# Altium PCB TEMPO.PcbDoc
Units mm, origin at the board's own origin, x right, y up, seen from the top; angles counter-clockwise.
Board outline 76.61 x 68.94 mm, 4 copper layers (Top Layer, Layer 1 - GND, Layer 2 - POWER, Bottom Layer), stack 1.541 mm thick; 93 components, 50 nets, 280 pads, 61 vias.
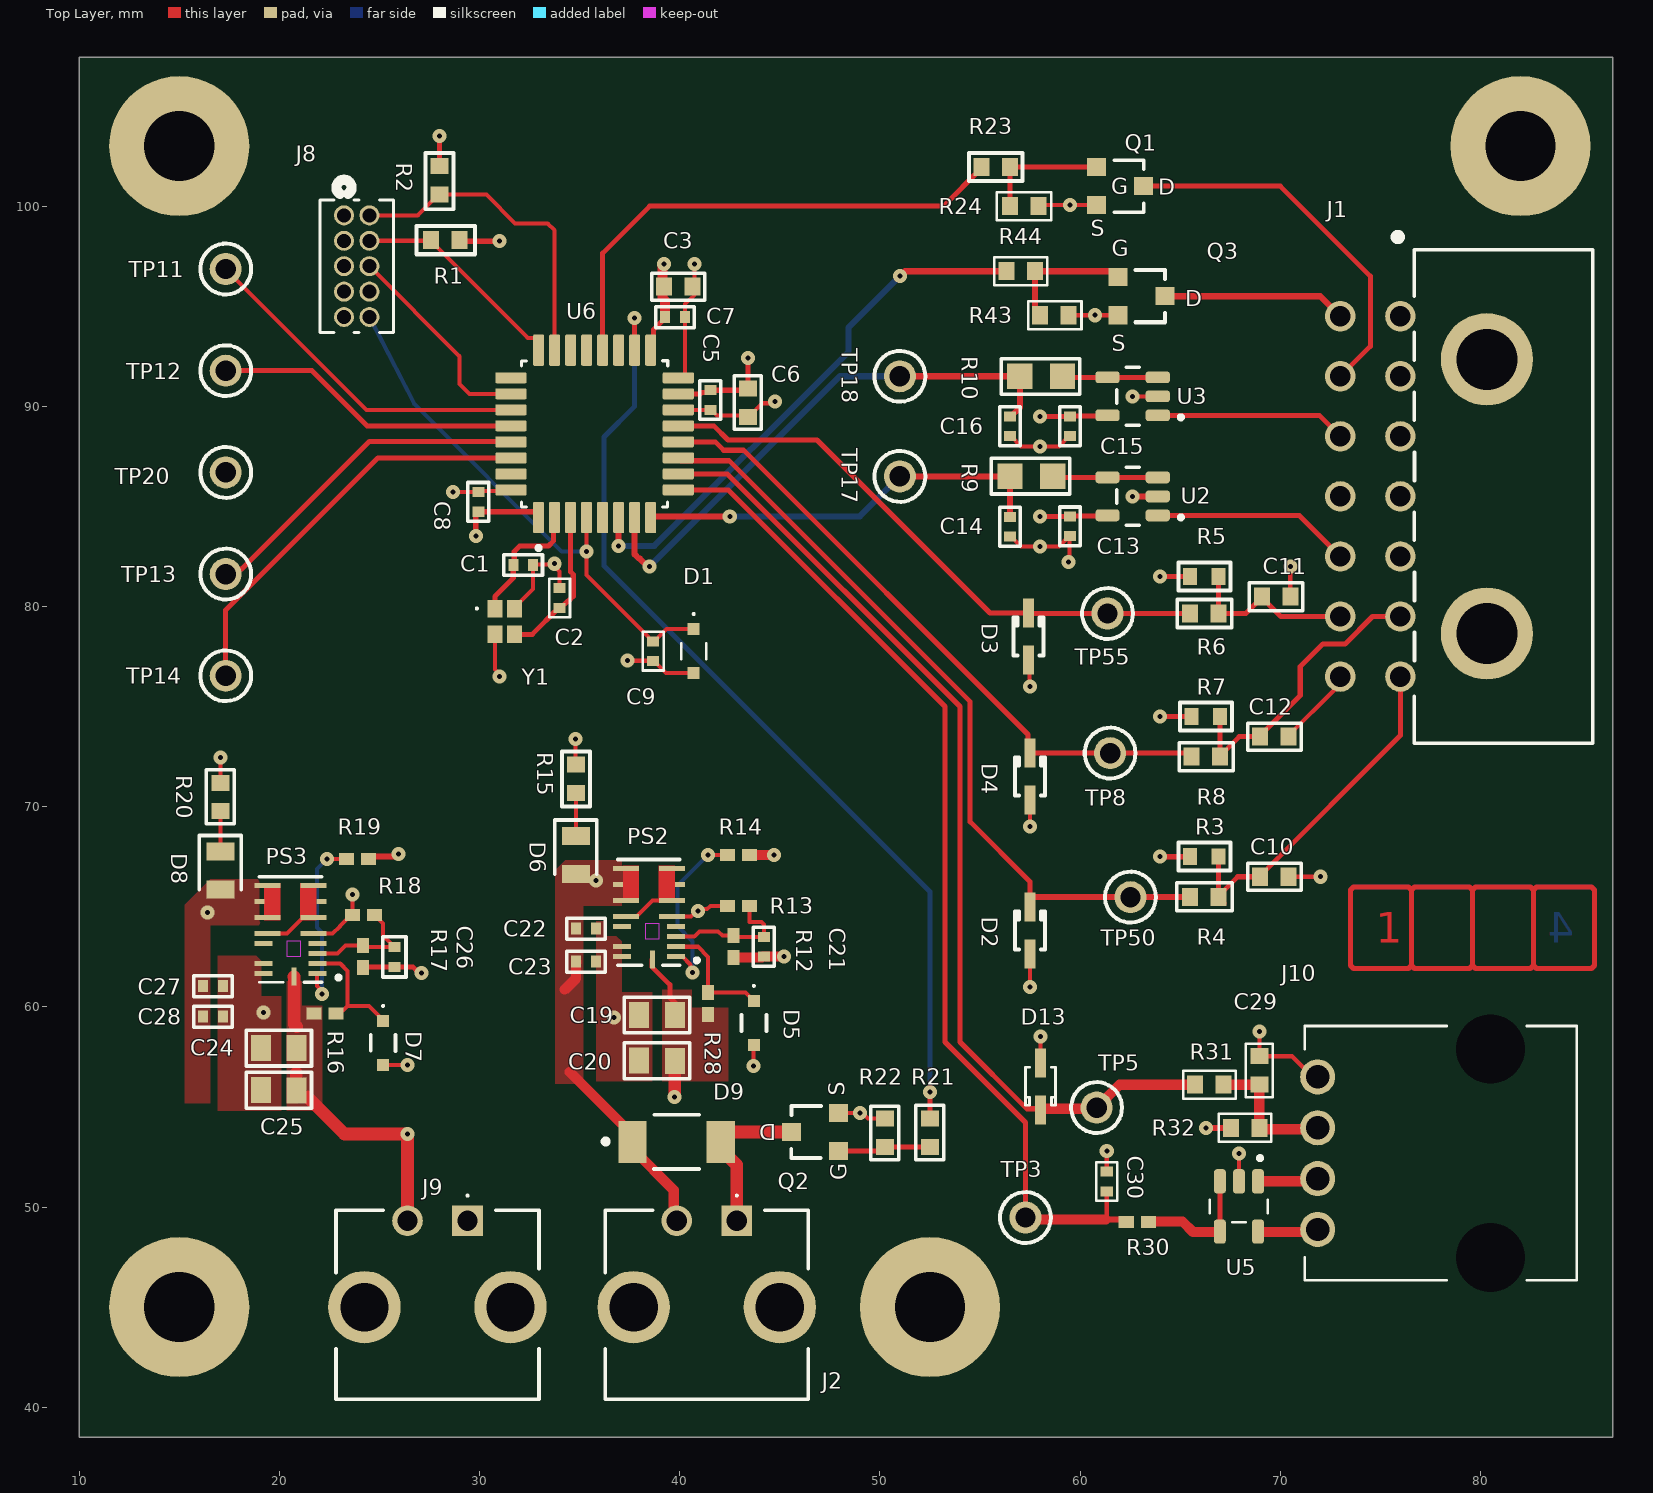
[diagram p0: Top Layer view]
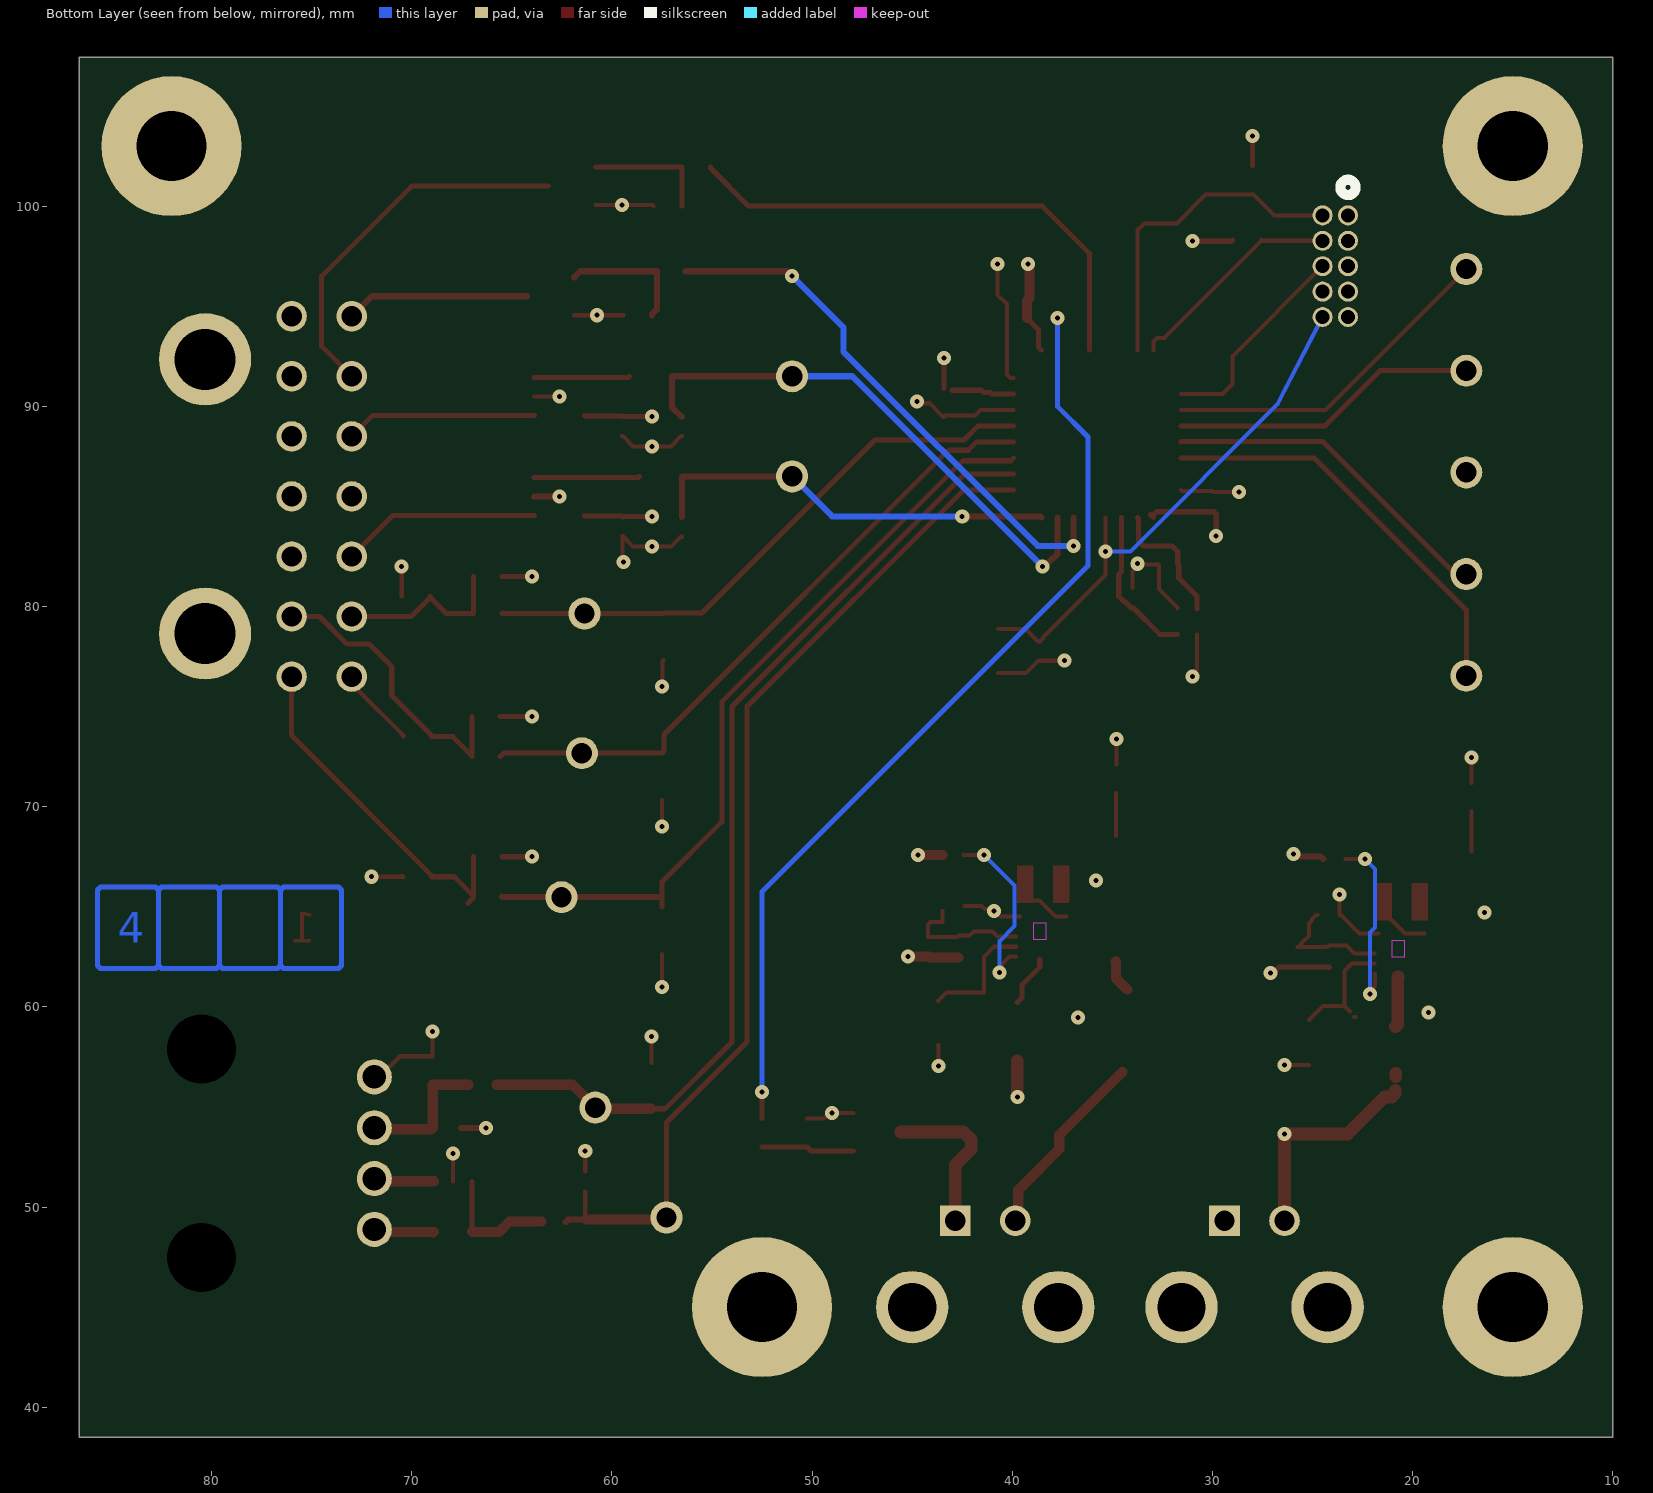
[diagram p1: Bottom Layer view, seen from below]
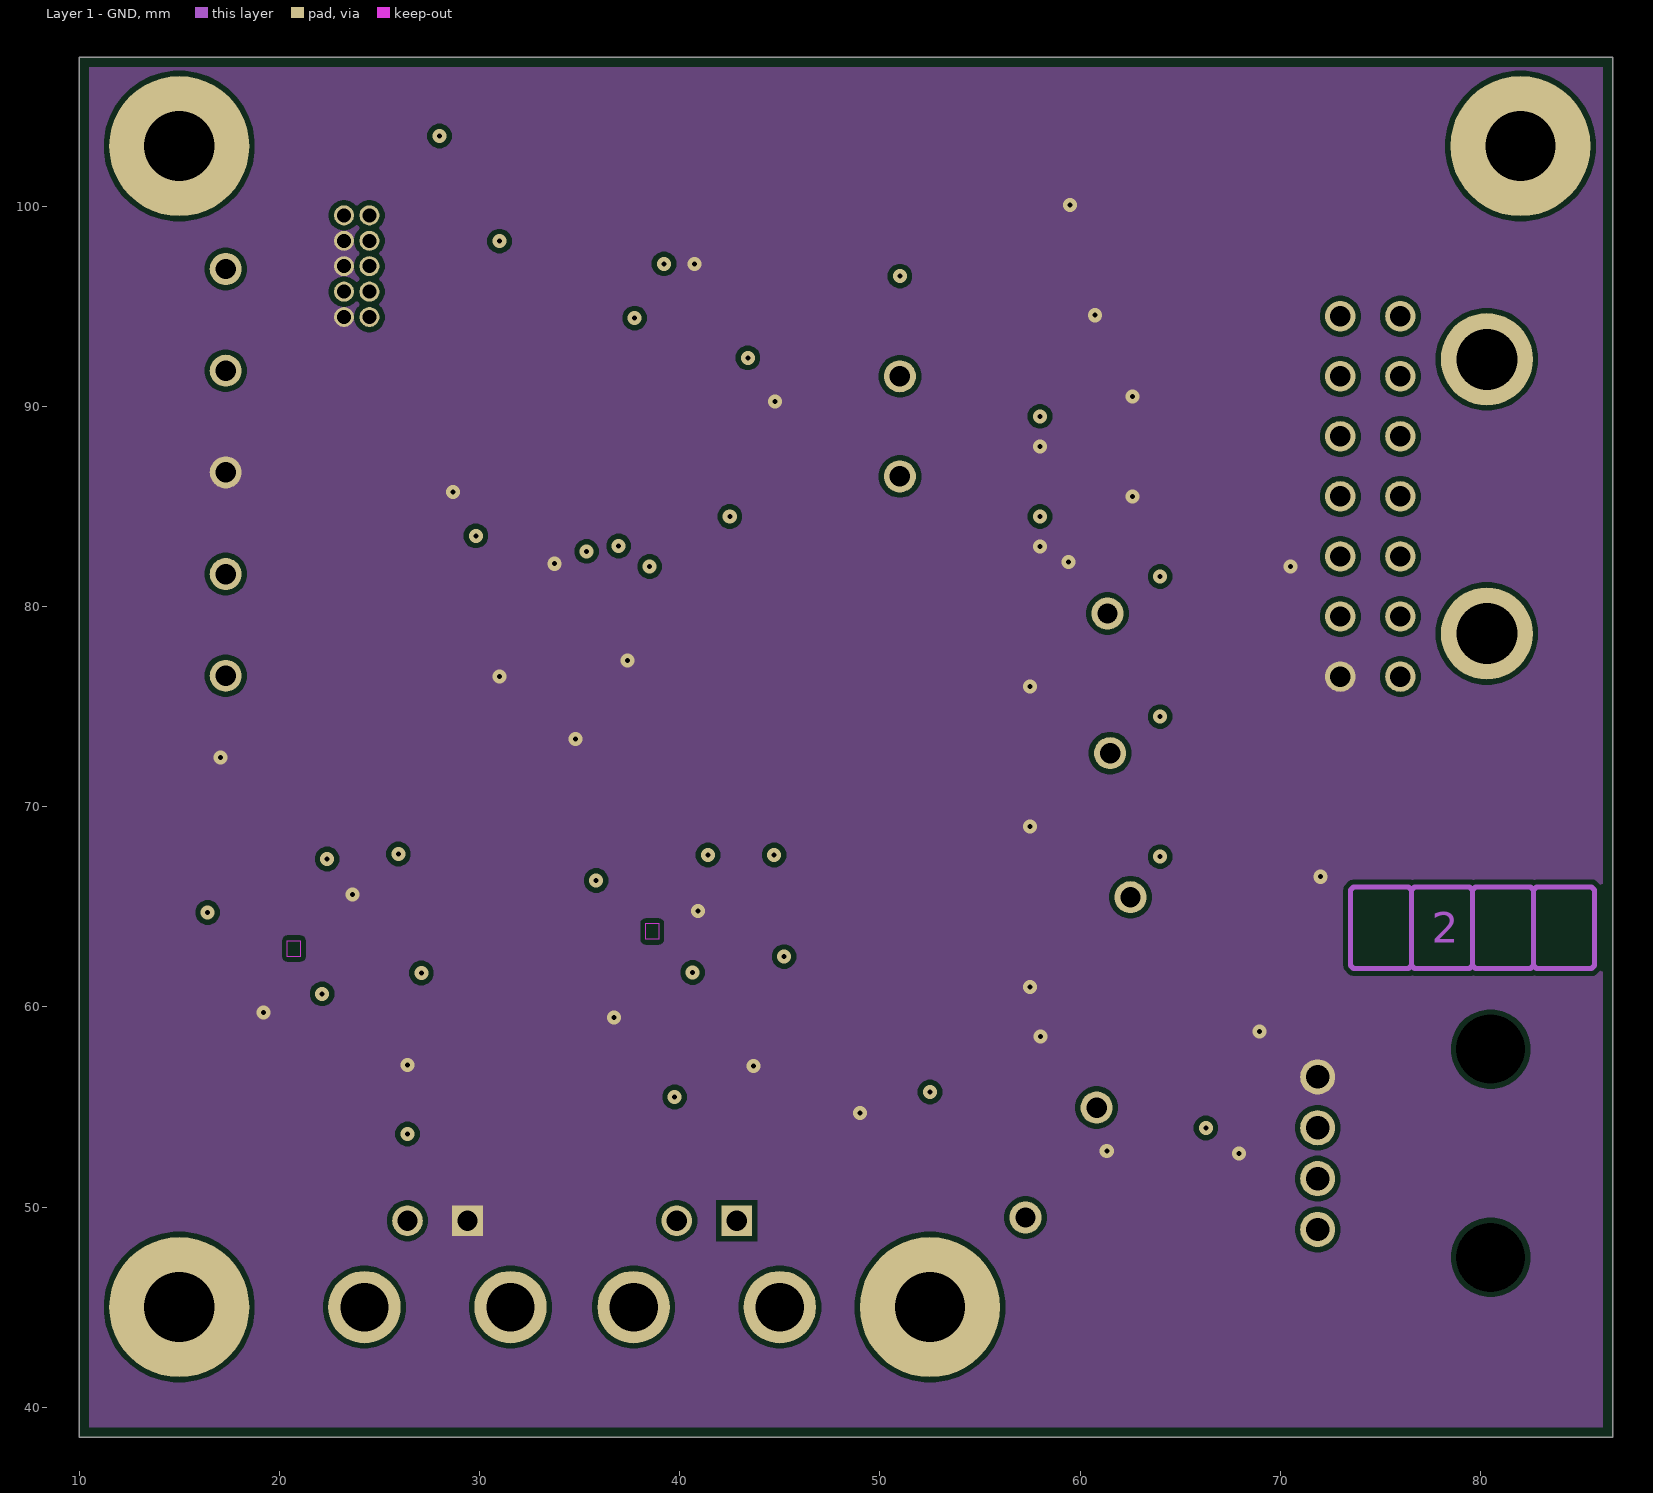
[diagram p2: Layer 1 - GND]
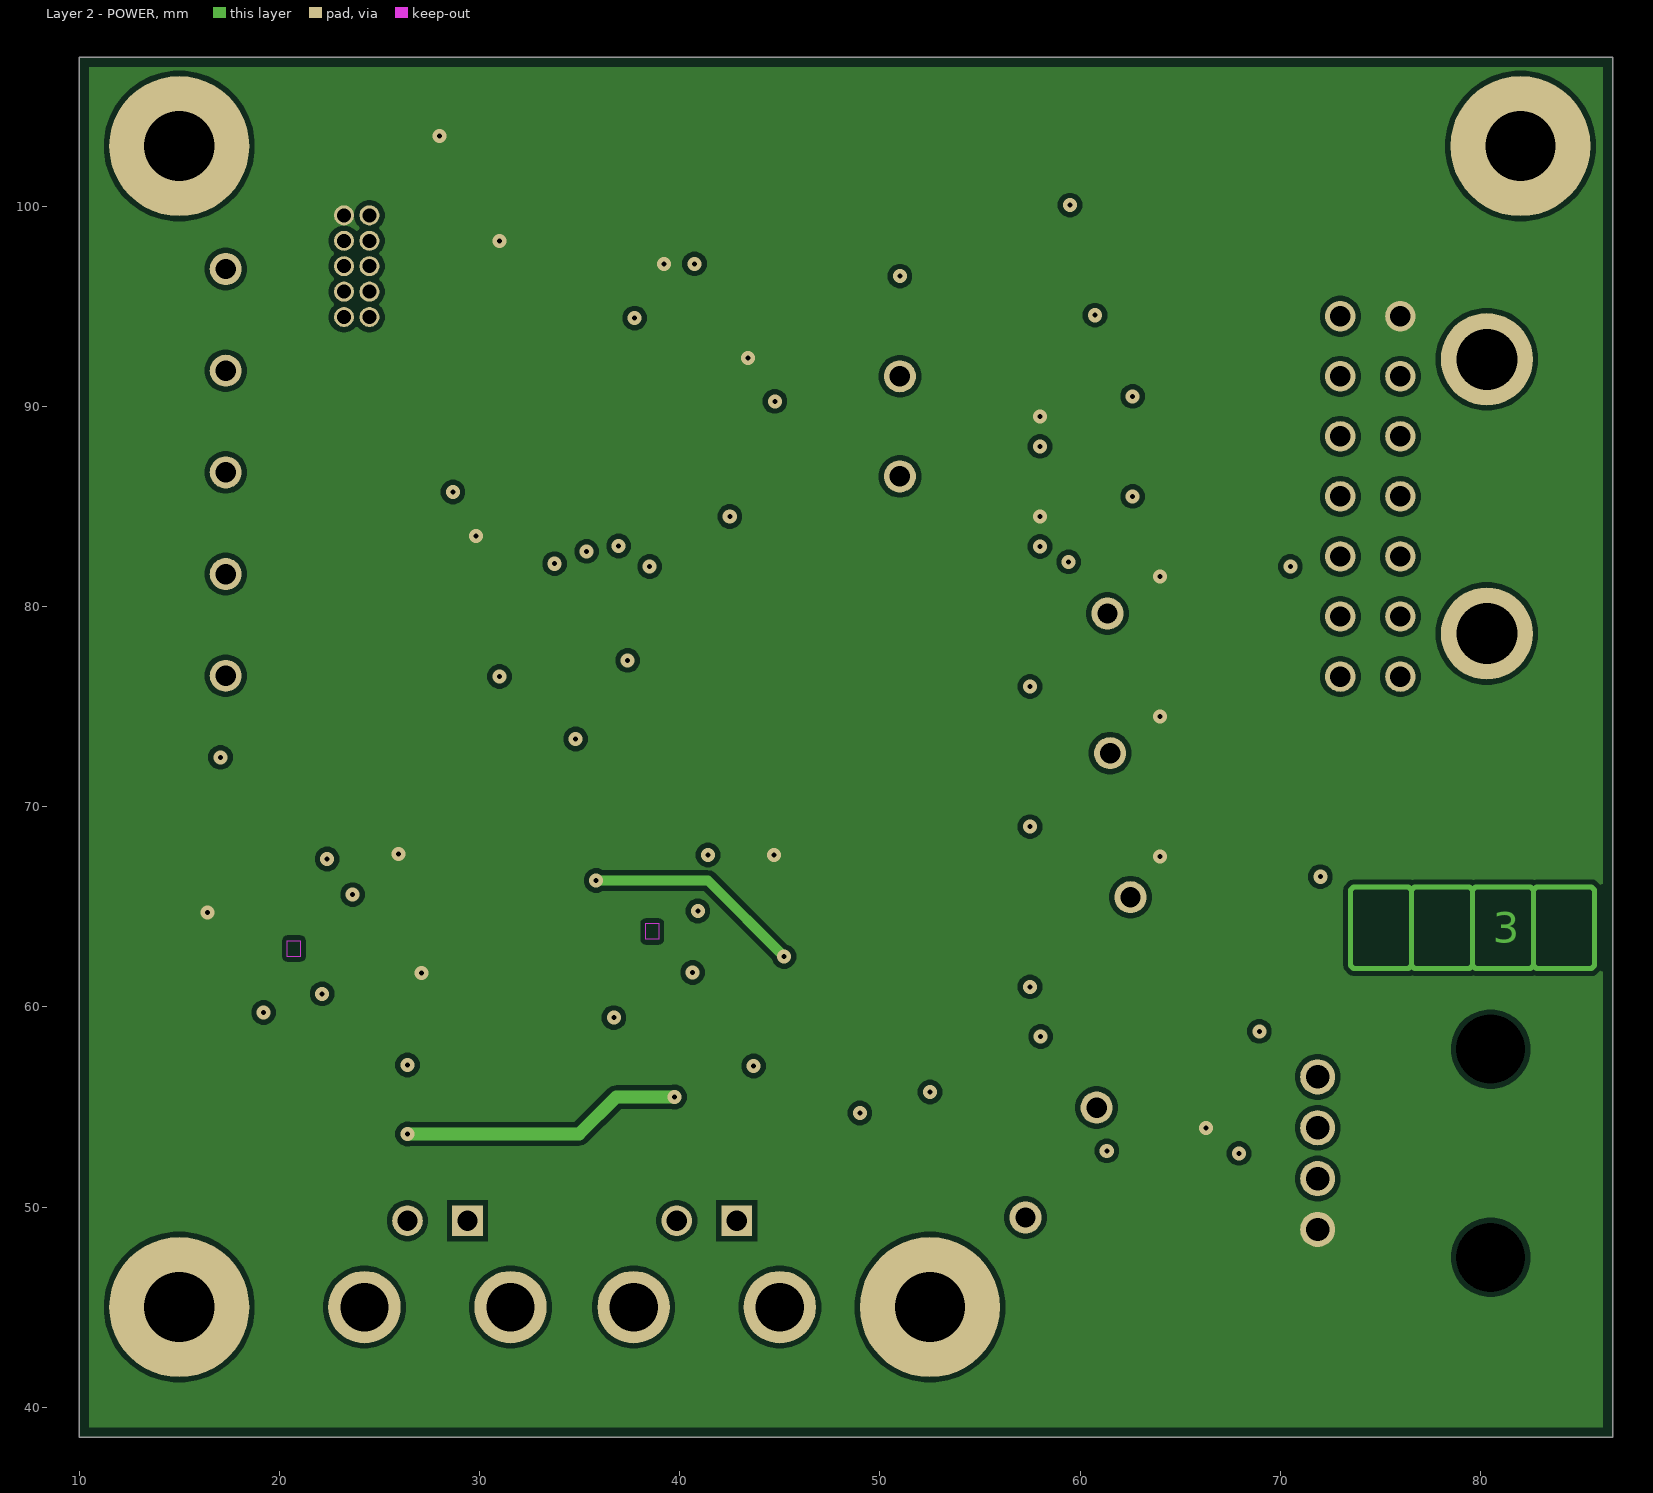
[diagram p3: Layer 2 - POWER]
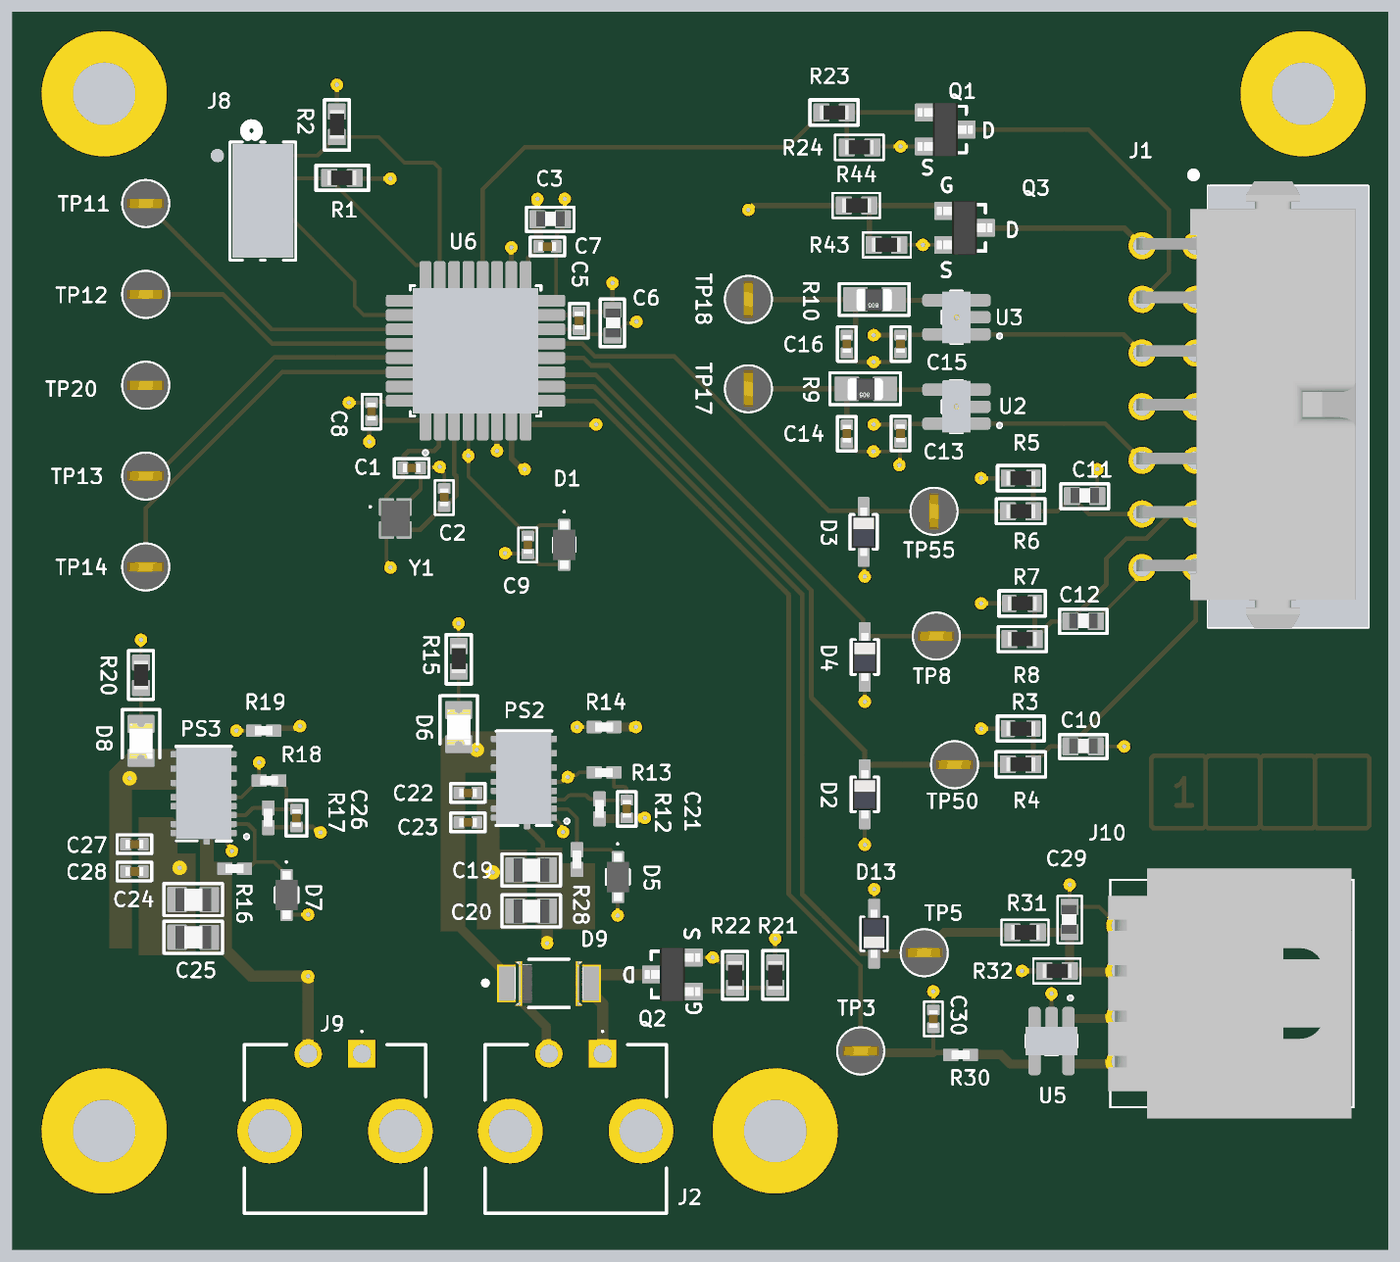
[diagram p4: 3D render of the assembled board from above, using the file's embedded part models]

## Layer stack, top to bottom
Top Solder: solder mask 0.0102, Solder Resist, Dk 3.5
Top Layer: signal copper 0.0356
Dielectric 2: prepreg 0.1, PP-006, Dk 4.1
Layer 1 - GND: signal copper 0.035
Dielectric 1: core 1.2, Core-043, Dk 4.3
Layer 2 - POWER: signal copper 0.035
Dielectric 3: prepreg 0.1, PP-006, Dk 4.1
Bottom Layer: signal copper 0.0356
Bottom Solder: solder mask 0.0102, Solder Resist, Dk 3.5

## Board outline
10,38.5 86.614,38.5 86.614,107.442 10,107.442

## Design rules (kind name [scope] priority, off if disabled: settings)
BoardOutlineClearance [All] p1: gap=0.5 ignorepadtopadclearanceinfootprint=FALSE
Clearance [All] p1: gap=0.254 ignorepadtopadclearanceinfootprint=TRUE except(0: Arc-Hole Track-Hole SMDPad-Hole THPad-Hole Via-Hole Fill-Hole Poly-Hole Region-Hole Text-Hole)
HoleSize [All] p1: absolutevalues=TRUE maxlimit=4 minlimit=0.25 maxpercent=80.000 minpercent=20.000
MinimumSolderMaskSliver [All] p1: minsoldermaskwidth=0.125
PasteMaskExpansion [All] p1: expansion=0.05
PolygonConnect [All] p1: connectstyle=Direct reliefconductorwidth=0.254 reliefentries=4 polygonreliefangle="90 Angle" airgapwidth=0.254
RoutingVias [All] p1: holewidth=0.711 width=1.27 viastyle="Through Hole" minholewidth=0.25 minwidth=0.7 maxholewidth=0.711 maxwidth=1.27
SilkToSilkClearance [All] p1: silktosilkclearance=0.125
SilkToSolderMaskClearance [IsPad] p1: minsilkscreentomaskgap=0.127 clearancetoexposedcopper=TRUE
SolderMaskExpansion [All] p1: expansion=0.05 istentingtop=FALSE
Width [All] p1 off: maxlimit=0.254 minlimit=0.254 preferedwidth=0.254
25 further rules are at their usual default settings.

## Classes and differential pairs
component class Alimentation: C19 C20 C21 C22 C23 C24 C25 C26 C27 C28 D5 D6 D7 D8 J9 PS2 PS3 R12 R13 R14 R15 R16 R17 R18 R19 R20 R28
component class main: D9 J1 J2 J10 Q2 Q3 R21 R22 R43 R44

## Components (designator, comment, footprint, x,y, rotation, side; value= is the part's Value field where it differs from the comment)
C1 "CMS_0402" CONDENSATEUR_CMS_0402 32.676,82.073 r180 top value="10p 50V"
C2 "CMS_0402" CONDENSATEUR_CMS_0402 34,79.927 r90 top value="10p 50V"
C3 "CMS_0603" CONDENSATEUR_CMS_0603 40.633,95.979 r180 top value="1u 16V"
C5 "CMS_0402" CONDENSATEUR_CMS_0402 41.529,89.814 r90 top value="100n 16V"
C6 "CMS_0603" CONDENSATEUR_CMS_0603 43.402,89.477 r90 top value="4.7u 16V"
C7 "CMS_0402" CONDENSATEUR_CMS_0402 40.259,94.455 r180 top value="100n 16V"
C8 "CMS_0402" CONDENSATEUR_CMS_0402 29.94,85.724 r270 top value="100n 16V"
C9 "CMS_0402" CONDENSATEUR_CMS_0402 38.671,77.272 r90 top value="100n 16V"
C10 "CMS_0603" CONDENSATEUR_CMS_0603 70.422,66.5 r180 top value="100nF 16V"
C11 "CMS_0603" CONDENSATEUR_CMS_0603 70.5,80.5 r180 top value="100nF 16V"
C12 "CMS_0603" CONDENSATEUR_CMS_0603 70.422,73.5 r180 top value="100nF 16V"
C13 "CMS_0402" CONDENSATEUR_CMS_0402 59.5,83.51 r90 top value="100nF 16V"
C14 "CMS_0402" CONDENSATEUR_CMS_0402 56.5,83.488 r90 top value="100nF 16V"
C15 "CMS_0402" CONDENSATEUR_CMS_0402 59.5,88.51 r90 top value="100nF 16V"
C16 "CMS_0402" CONDENSATEUR_CMS_0402 56.5,88.51 r90 top value="100nF 16V"
C19 "CMS_0805" CONDENSATEUR_CMS_0805 37.965,59.598 r0 top value="4.7u 25V"
C20 "CMS_0805" CONDENSATEUR_CMS_0805 37.965,57.312 r0 top value="100n 50V"
C21 "CMS_0402" CONDENSATEUR_CMS_0402 44.2,62.509 r90 top value=33p
C22 "CMS_0402" CONDENSATEUR_CMS_0402 34.828,63.906 r0 top value=47u10V
C23 "CMS_0402" CONDENSATEUR_CMS_0402 34.828,62.255 r0 top value="100n 50V"
C24 "CMS_0805" CONDENSATEUR_CMS_0805 19.076,57.946 r0 top value="4.7u 25V"
C25 "CMS_0805" CONDENSATEUR_CMS_0805 19.076,55.838 r0 top value="100n 50V"
C26 "CMS_0402" CONDENSATEUR_CMS_0402 25.743,62.001 r90 top value=33p
C27 "CMS_0402" CONDENSATEUR_CMS_0402 16.193,61.035 r0 top value=47u10V
C28 "CMS_0402" CONDENSATEUR_CMS_0402 16.193,59.511 r0 top value="100n 50V"
C29 "CMS_0603" CONDENSATEUR_CMS_0603 68.953,57.533 r270 top value="100nF 16V"
C30 "CMS_0402" CONDENSATEUR_CMS_0402 61.333,51.767 r270 top value="100nF 16V"
D1 "ESDALC6V1-1U2" PZU68B1AQX 40.7,77.775 r270 top
D2 "DIODE_CMS_ZENER_SOD323 : BZX384" DIODE_CMS_SOD323 57.5,63.825 r90 top
D3 "DIODE_CMS_ZENER_SOD323 : BZX384" DIODE_CMS_SOD323 57.433,78.5 r90 top
D4 "DIODE_CMS_ZENER_SOD323 : BZX384" DIODE_CMS_SOD323 57.5,71.5 r90 top
D5 "PZU6.8B1A-QX" PZU68B1AQX 43.7,59.203 r270 top
D6 "LG_R971" LEDC2012X90N 34.81,67.585 r270 top
D7 "PZU6.8B1A-QX" PZU68B1AQX 25.184,58.198 r270 top
D8 "LG_R971" LEDC2012X90N 17.056,66.811 r270 top
D9 "PMEG10030ELPX" FP-SOD128-MFG 39.85,53.25 r0 top
D13 "DIODE_CMS_ZENER_SOD323 : BZX384" DIODE_CMS_SOD323 58.023,56.026 r270 top
J1 "4-794620-4" 4-794620-4 76.7,73.175 r90 top
J2 "2-1445097-2" 214450972 42.85,49.32 r0 top
J8 "FTSH-105-01-L-D-K" CONN_FTSH-105-01-L-D-K_SAI 23.23,99.54 r270 top
J9 "2-1445097-2" 214450972 29.4,49.32 r0 top
J10 "70555-0038" 705550038 71.87,56.499 r90 top
PS2 "MPM3515GQV-AEC1-Z" CONV_MPM3515GQV-AEC1-Z 38.455,64.723 r180 top
PS3 "MPM3515GQV-AEC1-Z" CONV_MPM3515GQV-AEC1-Z 20.555,63.861 r180 top
Q1 "TRANSISTOR_MOSFET-N_SOT23_GSD" TRANSISTOR_MOSFET-N_SOT23_GSD 62,101 r270 top
Q2 "TRANSISTOR_MOSFET-N_SOT23_GSD" TRANSISTOR_MOSFET-N_SOT23_GSD 46.75,53.75 r90 top
Q3 "TRANSISTOR_MOSFET-N_SOT23_GSD" TRANSISTOR_MOSFET-N_SOT23_GSD 63.075,95.5 r270 top
R1 "RESISTANCE_CMS_0603" RESISTANCE_CMS_0603#1 27.578,98.297 r0 top value=1K
R2 "RESISTANCE_CMS_0603" RESISTANCE_CMS_0603#1 28,100.578 r90 top value=1K
R3 "RESISTANCE_CMS_0603" RESISTANCE_CMS_0603#2 66.922,67.5 r180 top value=1K
R4 "RESISTANCE_CMS_0603" RESISTANCE_CMS_0603#1 66.922,65.5 r180 top value=1K
R5 "RESISTANCE_CMS_0603" RESISTANCE_CMS_0603#3 66.922,81.5 r180 top value=1K
R6 "RESISTANCE_CMS_0603" RESISTANCE_CMS_0603#1 66.922,79.65 r180 top value=1K
R7 "RESISTANCE_CMS_0603" RESISTANCE_CMS_0603#3 67,74.5 r180 top value=1K
R8 "RESISTANCE_CMS_0603" RESISTANCE_CMS_0603#1 67,72.5 r180 top value=1K
R9 "RESISTANCE_CMS_0805" RESISTANCE_CMS_0805 58.634,86.5 r180 top value=3.3K
R10 "RESISTANCE_CMS_0805" RESISTANCE_CMS_0805 59.124,91.5 r180 top value=3.3K
R12 "75K" RESC1005X40N 42.684,63.013 r270 top
R13 "5.4K" RESC1005X40N 42.93,65.049 r0 top
R14 "75K" RESC1005X40N 42.938,67.585 r180 top
R15 "RESISTANCE_CMS_0603" RESISTANCE_CMS_0603#1 34.81,72.11 r270 top value=1K
R16 "75K" RESC1005X40N 22.288,59.663 r180 top
R17 "75K" RESC1005X40N 24.168,62.517 r270 top
R18 "24.3K" RESC1005X40N 24.21,64.591 r0 top
R19 "75K" RESC1005X40N 23.914,67.385 r180 top
R20 "RESISTANCE_CMS_0603" RESISTANCE_CMS_0603#1 17.056,71.195 r270 top value=1K
R21 "RESISTANCE_CMS_0603" RESISTANCE_CMS_0603#1 52.5,53 r90 top value=1K
R22 "RESISTANCE_CMS_0603" RESISTANCE_CMS_0603#1 50.25,53 r90 top value=1K
R23 "RESISTANCE_CMS_0603" RESISTANCE_CMS_0603#1 56.5,101.95 r180 top value=1K
R24 "RESISTANCE_CMS_0603" RESISTANCE_CMS_0603#1 56.5,100 r0 top value=1K
R28 "75K" RESC1005X40N 41.414,60.177 r270 top
R30 "3.3K" RESC1005X40N 62.857,49.253 r0 top
R31 "RESISTANCE_CMS_0603" RESISTANCE_CMS_0603#1 67.175,56.111 r180 top value=1K
R32 "RESISTANCE_CMS_0603" RESISTANCE_CMS_0603#1 68.953,53.952 r180 top value=1K
R43 "RESISTANCE_CMS_0603" RESISTANCE_CMS_0603#1 58,94.55 r0 top value=1K
R44 "RESISTANCE_CMS_0603" RESISTANCE_CMS_0603#1 57.75,96.75 r180 top value=1K
TP3 "5000" 5000 57.273,49.476 r0 top
TP5 "5000" 5000 60.825,54.968 r0 top
TP8 "5000" 5000 61.5,72.675 r0 top
TP11 "5000" 5000 17.32,96.86 r0 top
TP12 "5000" 5000 17.32,91.78 r0 top
TP13 "5000" 5000 17.32,81.62 r0 top
TP14 "5000" 5000 17.32,76.54 r0 top
TP17 "5000" 5000 51,86.5 r90 top
TP18 "5000" 5000 51,91.5 r90 top
TP20 "5001" 5000 17.32,86.7 r0 top
TP50 "5000" 5000 62.519,65.481 r180 top
TP55 "5000" 5000 61.371,79.65 r90 top
U2 "OPA348AIDBVR" SOT95P280X145-5N 62.626,85.5 r180 top
U3 "OPA348AIDBVR" SOT95P280X145-5N 62.626,90.5 r180 top
U5 "OPA348AIDBVR" SOT95P280X145-5N 67.937,50.03 r270 top
U6 "STM32G431KBT6" QFP80P900X900X160-32N 35.75,88.625 r90 top
Y1 "LFXTAL071257Reel" LFXTAL071257Reel 31.265,79.25 r270 top

## Footprints (in the part's own frame and the unit in brackets; to place one, negate y for a bottom-side part, rotate by r counter-clockwise, add the part's x,y. Pads: shape width x height; smd on the part's side, far side on the other; paste and mask are expansions set on the pad)
4-794620-4 [mm]
  round 1.52 hole 1.02: 1(21.325,0.7) 2(18.325,0.7) 3(15.325,0.7) 4(12.325,0.7) 5(9.325,0.7) 6(6.325,0.7) 7(3.325,0.7) 8(21.325,3.7) 9(18.325,3.7) 10(15.325,3.7) 11(12.325,3.7) 12(9.325,3.7) 13(6.325,3.7) 14(3.325,3.7)
  round 4.6 hole 3.05: 15(5.475,-3.62) 16(19.175,-3.62)
  silkscreen extent 0,-8.92 25.44,0.98, body extent -0.06,-8.22 24.94,4.02, height 8.71
5000 [mm]
  round 1.6 hole 1.02: 1(0,0)
  silkscreen extent -1.27,-1.27 1.27,1.27, body extent -1.26,-1.27 1.26,1.27, height 5
214450972 [mm]
  rect 1.53x1.53 hole 1.02: 1(0,0)
  round 1.53 hole 1.02: 2(-3,0)
  round 3.615 hole 2.41: MH1(-5.15,-4.32) MH2(2.15,-4.32)
  silkscreen extent -6.57,-8.92 3.57,1.3
705550038 [mm]
  round 1.755 hole 1.17: 1(0,0) 2(-2.54,0) 3(-5.08,0) 4(-7.62,0)
  round 1.725 hole 3.45 unplated: MH1(-9.01,-8.64) MH2(1.39,-8.64)
  silkscreen extent -10.16,-12.94 2.54,0.65, body extent -10.79,-12.83 3.18,0.76, height 6.86
CONDENSATEUR_CMS_0402 [mm] "CONDENSATEUR CMS  0402 ; DIMENSIONS : 1mm x 0.5mm"
  rect 0.5x0.6 smd: 1(0,0) 2(0.99,0)
  silkscreen extent -0.47,-0.52 1.46,0.52, body extent 0,-0.25 1,0.25, height 0.5
CONDENSATEUR_CMS_0603 [mm] "CONDENSATEUR CMS 0603 ; DIMENSIONS : 1.6mm x 0.86mm"
  rect 0.8x0.9 smd: 1(0,0) 2(1.422,0)
  silkscreen extent -0.62,-0.67 2.04,0.68, body extent -0.1,-0.46 1.5,0.4, height 0.85
CONDENSATEUR_CMS_0805 [mm] "CONDENSATEUR CMS 0805 ; DIMENSIONS : 2mm x 1.25mm"
  rect 1x1.3 smd: 1(0,0) 2(1.79,-0.01)
  silkscreen extent -0.74,-0.9 2.53,0.89, body extent -0.09,-0.67 1.91,0.64, height 0.73
CONN_FTSH-105-01-L-D-K_SAI [mm]
  round 1 hole 0.7 paste-0.584 mask+0: 1(0,0) 2(0,1.27) 3(1.27,0) 4(1.27,1.27) 5(2.54,0) 6(2.54,1.27) 7(3.81,0) 8(3.81,1.27) 9(5.08,0) 10(5.08,1.27)
  silkscreen extent -1.78,-1.21 5.84,2.48
CONV_MPM3515GQV-AEC1-Z [mm]
  rect 0.9x0.25 smd: 1(-1.35,2.2) 2(-1.35,1.7) 3(-1.35,1.2) 4(-1.35,0.7) 13(1.35,0.7) 14(1.35,1.7) 15(1.35,2.2)
  rect 1.3x0.25 smd: 5(-1.15,0.2) 6(-1.15,-0.6) 8(-1.15,-2.2) 9(1.15,-2.2) 11(1.15,-0.6) 12(1.15,0.2)
  rect 0.5x0.25 smd: 7(-1.55,-1.4) 10(1.55,-1.4)
  rect 0.25x0.9 smd: 16(-0.175,2.35)
  Top Layer region: 1.3,-2.325 0.5,-2.325 0.5,-0.48 0.5,-0.475 1.3,-0.475
  Top Layer region: -0.5,-2.325 -1.3,-2.325 -1.3,-0.475 -0.5,-0.475
  Keep-Out Layer region: 0.15,0.55 -0.5,0.55 -0.5,1.35 0.15,1.35
  Keep-Out Layer region: 0.15,0.55 -0.5,0.55 -0.5,1.35 0.15,1.35
  silkscreen extent -2.5,-2.64 1.55,2.64
DIODE_CMS_SOD323 [mm] "DIODE CMS SOD323 ; DIMENSIONS : 1.7mm x 1.3mm"
  rect 1.45x0.55 smd: 1(-1.175,0) 2(1.175,0)
  silkscreen extent -0.95,-0.75 0.95,0.75, body extent -1.35,-0.68 1.35,0.67, height 0.79
FP-SOD128-MFG [mm]
  rect 1.4x2.1 smd paste-1000 mask+0: 1(-2.2,0) 2(2.2,0)
  silkscreen extent -3.67,-1.35 1.13,1.35, body extent -3.1,-1.7 3.1,1.7, height 0.25
LEDC2012X90N [mm]
  rect 0.9x1.4 smd: 1(-0.95,0) 2(0.95,0)
  silkscreen extent -1.75,-1.05 0.95,1.05, body extent -1,-0.65 1,0.65, height 0.8
LFXTAL071257Reel [mm]
  rect 0.88x0.75 smd: 1(-0.64,-0.49) 2(0.64,-0.49) 3(0.64,0.49) 4(-0.64,0.49)
  silkscreen extent -0.7,-1.45 -0.6,-1.35, body extent -1,-0.8 1,0.8, height 0.6
PZU68B1AQX [mm]
  rect 0.6x0.6 smd: 1(-1.1,0) 2(1.1,0)
  silkscreen extent -1.9,-0.63 0.4,0.63, body extent -1.34,-0.63 1.34,0.63, height 1.2
QFP80P900X900X160-32N [mm]
  rrect25% 1.56x0.55 smd: 1(-4.18,2.8) 2(-4.18,2) 3(-4.18,1.2) 4(-4.18,0.4) 5(-4.18,-0.4) 6(-4.18,-1.2) 7(-4.18,-2) 8(-4.18,-2.8) 17(4.18,-2.8) 18(4.18,-2) 19(4.18,-1.2) 20(4.18,-0.4) 21(4.18,0.4) 22(4.18,1.2) 23(4.18,2) 24(4.18,2.8)
  rrect25% 0.55x1.56 smd: 9(-2.8,-4.18) 10(-2,-4.18) 11(-1.2,-4.18) 12(-0.4,-4.18) 13(0.4,-4.18) 14(1.2,-4.18) 15(2,-4.18) 16(2.8,-4.18) 25(2.8,4.18) 26(2,4.18) 27(1.2,4.18) 28(0.4,4.18) 29(-0.4,4.18) 30(-1.2,4.18) 31(-2,4.18) 32(-2.8,4.18)
  silkscreen extent -5.8,-3.65 3.65,3.65
RESC1005X40N [mm]
  rect 0.75x0.6 smd: 1(-0.55,0) 2(0.55,0)
  body extent -0.5,-0.25 0.5,0.25, height 0.35
RESISTANCE_CMS_0603#1 [mm] "RESISTANCE CMS 0603 ; DIMENSIONS : 1.6mm x 0.8mm"
  rect 0.8x0.9 smd: 1(0,0) 2(1.422,0)
  silkscreen extent -0.74,-0.7 2.18,0.7, body extent -0.1,-0.4 1.5,0.4, height 0.44
RESISTANCE_CMS_0603#2 [mm] "RESISTANCE CMS 0603 ; DIMENSIONS : 1.6mm x 0.8mm"
  rect 0.7x0.8 smd: 1(0,0)
  rect 0.7x0.85 smd: 2(1.422,0)
  silkscreen extent -0.6,-0.7 2,0.7, body extent -0.1,-0.4 1.5,0.4, height 0.44
RESISTANCE_CMS_0603#3 [mm] "RESISTANCE CMS 0603 ; DIMENSIONS : 1.6mm x 0.8mm"
  rect 0.7x0.85 smd: 1(0,0) 2(1.422,0)
  silkscreen extent -0.6,-0.7 2,0.7, body extent -0.1,-0.4 1.5,0.4, height 0.44
RESISTANCE_CMS_0805 [mil] "RESISTANCE CMS 0805 ; DIMENSIONS : 2mm x 1.25mm"
  rect 50x50 smd: 1(0,0) 2(84,0)
  silkscreen extent -34,-35 121,35, body extent 4,-24 83,26, height 31
SOT95P280X145-5N [mm]
  rrect50% 1.21x0.59 smd: 1(-1.255,0.95) 2(-1.255,0) 3(-1.255,-0.95) 4(1.255,-0.95) 5(1.255,0.95)
  silkscreen extent -2.51,-1.45 0.8,1.45
TRANSISTOR_MOSFET-N_SOT23_GSD [mm] "SOT23 ; DIMENSIONS : 3.0mm x 2.5 mm"
  rect 0.9x0.95 smd: 1(-0.95,-1.175) 2(0.95,-1.175) 3(0,1.175)
  silkscreen extent -1.3,-0.3 1.3,1.18, body extent -1.5,-1.57 1.5,1.57, height 1.1

## Part data
C1 C2 C5 C7 C8 C9 C13 C14 C15 C16 C21 C22 C23 C26 C27 C28 C30: library part CONDENSATEUR_CMS_CER_0402, "CONDENSATEUR CMS CERAMIQUE 0402"
  C1 C2 C5 C7 C8 C9 C13 C14 C15 C16 C21 C22 C26 C27 C30: Type=0402
  C23 C28: Type=0805
C3 C6 C10 C11 C12 C29: library part CONDENSATEUR_CMS_CER_0603, "CONDENSATEUR CMS CERAMIQUE 0603", Type=0603
C19 C20 C24 C25: library part CONDENSATEUR_CMS_CER_0805, "CONDENSATEUR CMS CERAMIQUE 0805", Type=0805
D1: library part PZU6.8B1A-QX, "Zener Diode", Manufacturer_Name=Nexperia, Datasheet Link=https://assets.nexperia.com/documents/data-sheet/PZUXBA-Q_SER.pdf, Height=1.1mm, Manufacturer_Part_Number=PZU6.8B1A-QX
D5 D7: "Zener Diode", Manufacturer_Name=Nexperia, Datasheet Link=https://assets.nexperia.com/documents/data-sheet/PZUXBA-Q_SER.pdf, Height=1.1mm, Manufacturer_Part_Number=PZU6.8B1A-QX
D6 D8: "Green 570nm LED Indication - Discrete 2.2V 0805 (2012 Metric)", Package="0805 Osram Opto", Availability="In Stock", Check_prices=https://www.snapeda.com/parts/LG%20R971/OSRAM+Opto+Semiconductors+Inc./view-part/?ref=eda, MF="OSRAM Opto", MP="LG R971", Price=None, SnapEDA_Link=https://www.snapeda.com/parts/LG%20R971/OSRAM+Opto+Semiconductors+Inc./view-part/?ref=snap
D9: library part CMP-14398-000022-1, "DIODE SCHOTTKY 100V 3A SOD128"
J1: "Connector", Manufacturer_Name="TE Connectivity", Mouser Part Number=571-4-794620-4, Arrow Part Number=4-794620-4, Arrow Price/Stock=https://www.arrow.com/en/products/4-794620-4/te-connectivity?region=nac, Datasheet Link=https://www.te.com/commerce/DocumentDelivery/DDEController?Action=srchrtrv&DocNm=1773458-4_MICRO_MATE_N_LOK&DocType=Data+Sheet&DocLang=English&PartCntxt=4-794620-4&DocFormat=pdf, Manufacturer_Part_Number=4-794620-4, Mouser Price/Stock=https://www.mouser.com/Search/Refine.aspx?Keyword=571-4-794620-4
J2 J9: "MICRO MNL HDR ASSY S/ROW AU LF", Manufacturer_Name="TE Connectivity", Mouser Part Number=571-2-1445097-2, Datasheet Link=https://www.te.com/commerce/DocumentDelivery/DDEController?Action=showdoc&DocId=Customer+Drawing%7F1445097%7FA2%7Fpdf%7FEnglish%7FENG_CD_1445097_A2.pdf%7F2-1445097-2, Geometry.Height=5.8mm, Manufacturer_Part_Number=2-1445097-2, Mouser Price/Stock=https://www.mouser.co.uk/ProductDetail/TE-Connectivity-AMP/2-1445097-2?qs=WeHYKPpr%2FZjBFQqBJ1Kj7A%3D%3D
J8: "No Description Available", Mfr_Name="Samtec Inc", Digi-Key_Part_Number_1=SAM8798-ND, RefDes=RefDes, Type=Type
J10: "Connector", Manufacturer_Name=Molex, RS Part Number=7978792P, Allied_Number=70091307, Datasheet Link=http://uk.rs-online.com/web/p/products/7978792P, Height=7.25mm, Manufacturer_Part_Number=70555-0038, RS Price/Stock=http://uk.rs-online.com/web/p/products/7978792P
PS2 PS3: "Non-Isolated PoL Module DC DC Converter 1 Output 0.8 ~ 30V 1.5A 4V - 36V Input", Package="QFN-17 Monolithic Power Systems", Availability=Unavailable, DigiKey-Purchase-URL=https://snapeda.com/shop?store=DigiKey&id=1050597, MF="Monolithic Power", MP=MPM3515GQV-AEC1-Z, Price=None, SnapEDA_Link=https://www.snapeda.com/parts/MPM3515GQV-AEC1-Z/Monolithic%20Power%20Systems%20Inc./view-part/1050597/?ref=snap
Q1 Q2 Q3: "TRANSISTOR MOSFET CANAL N BOITIER SOT23_GSD", Package=N_SOT23
R1 R2 R3 R4 R5 R6 R7 R8 R15 R20 R21 R22 R23 R24 R31 R32 R43 R44: "RESISTANCE CMS 0603"
  R1 R2 R3 R4 R5 R6 R7 R8 R21 R23 R31 R32 R44: Type=0603
  R15 R20: Type=0805
  R22 R24 R43: Type=CMS_0603
R9 R10: "RESISTANCE CMS 0805", Type=0402
R12 R13 R14 R16 R17 R18 R19 R28 R30: library part CRCW04020000Z0ED, "Resistor", Manufacturer_Name=Vishay, RS Part Number=2508364793, Allied_Number=70202079, Datasheet Link=http://uk.rs-online.com/web/p/products/2508364793, Height=0.4mm, Manufacturer_Part_Number=CRCW04020000Z0ED, RS Price/Stock=http://uk.rs-online.com/web/p/products/2508364793
TP3 TP5 TP8 TP11 TP12 TP13 TP14 TP17 TP18 TP50 TP55: "Connector", Manufacturer_Name="Keystone Electronics", Mouser Part Number=534-5000, Arrow Part Number=5000, Arrow Price/Stock=https://www.arrow.com/en/products/5000/keystone-electronics?region=europe, Datasheet Link=http://www.keyelco.com/product-pdf.cfm?p=1309, Manufacturer_Part_Number=5000, Mouser Price/Stock=https://www.mouser.co.uk/ProductDetail/Keystone-Electronics/5000?qs=q0tsjPZWdm%252B9SiiTAbEwUw%3D%3D
TP20: library part 5000, "Connector", Manufacturer_Name="Keystone Electronics", Mouser Part Number=534-5000, Arrow Part Number=5000, Arrow Price/Stock=https://www.arrow.com/en/products/5000/keystone-electronics?region=europe, Datasheet Link=http://www.keyelco.com/product-pdf.cfm?p=1309, Manufacturer_Part_Number=5000, Mouser Price/Stock=https://www.mouser.co.uk/ProductDetail/Keystone-Electronics/5000?qs=q0tsjPZWdm%252B9SiiTAbEwUw%3D%3D
U2 U3 U5: "1MHz, 45uA, RRIO, Single Op Amp 5-SOT-23 -40 to 125", Package="SOT-23-5 Texas Instruments", Arrow_Electronics-Purchase-URL=https://snapeda.com/shop?store=Arrow+Electronics&id=560751, Digi-Key_Part_Number=296-26277-1-ND, DigiKey-Purchase-URL=https://snapeda.com/shop?store=DigiKey&id=560751, MF="Texas Instruments", Mouser-Purchase-URL=https://snapeda.com/shop?store=Mouser&id=560751, MP=OPA348AIDBVR, SnapEDA_Link=https://www.snapeda.com/parts/OPA348AIDBVR/Texas%20Instruments/view-part/560751/?ref=snap, Texas_Instruments-Purchase-URL=https://snapeda.com/shop?store=Texas+Instruments&id=560751
U6: "ARMÂ® CortexÂ®-M4F STM32G4 Microcontroller IC 32-Bit 170MHz 128KB _128K x 8_ FLASH 32-LQFP _7x7_", Package="LQFP-32 STMicroelectronics", Availability=Unavailable, MF=STMicroelectronics, MP=STM32G431KBT6, Price=None, SnapEDA_Link=https://www.snapeda.com/parts/STM32G431KBT6/STMicroelectronics/view-part/4422336/?ref=snap
Y1: "Crystal or Oscillator", Manufacturer_Name=IQD, Mouser Part Number=449-LFXTAL071257REEL, Datasheet Link=https://www.iqdfrequencyproducts.com/products/pn/LFXTAL071257Reel.pdf, Height=0.5mm, Manufacturer_Part_Number=LFXTAL071257Reel, Mouser Price/Stock=https://www.mouser.co.uk/ProductDetail/IQD/LFXTAL071257Reel?qs=nFovR%252B4R4UNJEiCmxCmq2g%3D%3D
D2 D3 D4 D13: Type=BZX384

## Free pads (board coordinates)
  round 7 hole 3.5: 0(15,45) 0(15,103) 0(52.5,45) 0(82,103)

## Via types
v1: diameter 0.7, hole 0.25, Top Layer to Bottom Layer, 61 vias

## Nets (pads, with @x,y where several pads share a name; then routed paths per layer and width w, separated by ;. In a path a pad name is that pad's centre, name@x,y a point inside that pad or via, vN(x,y) a via of type N, cw(c..) or ccw(c..) an arc to the next point about the centre after c; other vN are vias at no path point)
3.3V: C3.2 C5.2 C6.2 C7.2 C8.2 C13.2 C15.2 C26.1 C27.1 C28.1 D8.2 J1.1 J8.1 J10.4 PS3.9 PS3.10 PS3.11 R1.2 R2.2 R3.2 R5.2 R7.2 R14.1 R17.2 R19.1 R32.2 U2.5 U3.5 U5.5 U6.1 U6.15 U6.17 | length 39
  Top Layer w0.254: R17.2 24.185,61.984 25.726,61.984 C26.1 26.663,62.001 26.968,61.695 v1(27.089,61.695) ; R2.2 v1(28,103.5) ; R1.2 29.05,98.247 v1(31,98.247) ; v1(29.813,83.533) 29.813,84.611 29.936,84.734 C8.2 32.802,84.734 32.95,84.586 U6.1 U6.1@33.094,84.589 ; U6.17 38.698,92.953 38.698,93.834 C7.2@39.269,94.405 ; U6.15 41.033,90.625 41.088,90.681 41.406,90.681 C5.2 C6.2@43.021,90.804 ; C6.2 v1(43.402,92.423) ; v1(58,84.5) 59.456,84.5 59.478,84.478 C13.2 59.525,84.525 61.346,84.525 U2.5 ; v1(58,89.5) C15.2 59.525,89.525 61.346,89.525 U3.5 ; v1(64,67.5) R3.2 ; v1(64,74.5) R7.2 ; v1(64,81.5) R5.2
  Top Layer w0.305: R19.1 24.591,67.512 25.819,67.512 v1(25.946,67.639) ; v1@27.049,61.735 v1(27.089,61.695) ; v1(66.286,53.952) R32.2
  Top Layer w0.508: v1(39.211,97.122) 39.211,97.07 39.148,97.007 39.148,95.407 39.269,95.286 C7.2 C7.2@39.269,94.405 ; R14.1 v1(44.716,67.585) ; U5.5@68.928,48.734 68.902,48.76 71.732,48.76 J10.4@71.747,48.745
  other v1: 16.421,64.718
28VDC: C19.2 C20.2 C24.2 C25.2 J9.2 PS2.16 PS3.16 R16.2 R28.2 | length 32.1
  Top Layer w0.254: PS2.16 38.63,61.983 39.508,61.105 39.508,60.47 C19.2@39.755,60.223
  Top Layer w0.635: PS3.16 20.739,61.502 20.739,59.13 20.866,59.003 ; 20.841,56.516 20.841,56.666 ; C25.2 20.866,55.678 21.048,55.495 21.405,55.495 23.25,53.65 v1(26.4,53.65) J9.2 ; v1(39.75,55.5) 39.752,55.502 39.752,57.3 C20.2
  Layer 2 - POWER w0.635: v1(26.4,53.65) 34.977,53.65 36.827,55.5 v1(39.75,55.5)
+12: C21.1 C22.1 C23.1 D6.2 D9.1 J2.2 PS2.9 PS2.10 PS2.11 R12.2 | length 24.8
  Top Layer w0.254: v1@45.214,62.507 v1(45.216,62.509)
  Top Layer w0.508: 34.25,60.86 34.824,61.434 34.824,62.251 C23.1 ; 34.488,56.75 34.5,56.75 37.65,53.6 D9.1 37.65,52.9 39.703,50.847 39.703,49.467 J2.2 ; R12.2 44.112,62.463 44.158,62.509 C21.1 v1(45.216,62.509)
  Layer 2 - POWER w0.508: v1(35.826,66.315) 41.41,66.315 v1(45.216,62.509)
ADC1_IN3: C16.2 R10.2 TP18.1 U6.7 | length 27.5
  Top Layer w0.305: U6.7 37.75,82.607 37.966,82.392 38.001,82.392 38.393,82 v1(38.5,82) ; TP18.1 R10.2 56.99,89.94 56.55,89.5 C16.2
  Bottom Layer w0.305: v1(38.5,82) 48,91.5 TP18.1
ADC1_IN4: C14.2 R9.2 TP17.1 U6.8 | length 20.8
  Top Layer w0.305: U6.8 38.605,84.5 v1(42.5,84.5) ; TP17.1 R9.2 C14.2
  Bottom Layer w0.305: v1(42.5,84.5) 49,84.5 TP17.1
ADC2_IN17: C30.2 R30.1 TP3.1 U6.9 | length 51.5
  Top Layer w0.203: 61.289,49.376 61.333,49.42 C30.2
  Top Layer w0.254: U6.9 42.425,85.825 53.25,75 53.25,58.25 57.273,54.227 TP3.1
  Top Layer w0.305: 61.289,49.376 62.184,49.376 R30.1
  Top Layer w0.508: TP3.1 57.373,49.376 61.289,49.376
BTN: C29.2 J10.2 R31.1 R32.1 | length 6.8
  Top Layer w0.508: R31.1 C29.2 R32.1 69.016,53.888 71.683,53.888 J10.2@71.747,53.825
CMD_RELAI: R23.2 U6.20 | length 25.6
  Top Layer w0.254: U6.20 36.15,97.65 38.5,100 53.178,100 55.078,101.9 R23.2
DEBUG1: TP11.1 U6.27 | length 17.2
  Top Layer w0.203: TP11.1 24.355,89.825 U6.27
DEBUG2: TP12.1 U6.28 | length 15.4
  Top Layer w0.254: TP12.1 21.625,91.78 24.38,89.025 U6.28
DEBUG3: TP13.1 U6.29 | length 17
  Top Layer w0.254: TP13.1 17.578,81.878 18.128,81.878 24.5,88.25 31.545,88.25 U6.29
DEBUG4: TP14.1 U6.30 | length 20.7
  Top Layer w0.254: TP14.1 17.32,79.82 24.925,87.425 U6.30
FAN_NET: R21.2 U6.18 | length 49
  Top Layer w0.254: U6.18 v1(37.75,94.405) ; R21.2 v1(52.5,55.75)
  Bottom Layer w0.254: v1(37.75,94.405) 37.75,90 36.219,88.469 36.219,82.031 52.5,65.75 v1(52.5,55.75)
GND: C1.1 C2.2 C3.1 C5.1 C6.1 C7.1 C8.1 C9.1 C10.1 C11.1 C12.1 C13.1 C14.1 C15.1 C16.1 C19.1 C20.1 C22.2 C23.2 C24.1 C25.1 C27.2 C28.2 C29.1 C30.1 D1.2 D2.1 D3.1 D4.1 D5.2 D7.2 D13.1 J1.14 J8.3 J8.5 J8.9 J9.1 J10.1 PS2.5 PS2.14 PS2.15 PS3.5 PS3.14 PS3.15 Q1.2 Q2.2 Q3.2 R13.1 R15.1 R18.1 R20.1 R22.2 R24.2 R43.2 TP20.1 U2.2 U3.2 U5.2 U6.14 U6.16 U6.32 Y1.2 Y1.4 | length 74.7
  Top Layer w0.203: R20.1 v1(17.056,72.465) ; PS3.5 22.66,63.661 23.023,64.024 23.023,64.029 23.585,64.591 R18.1 v1(23.66,65.607) ; D7.2 v1(26.4,57.098) ; v1(28.67,85.724) C8.1 29.991,85.774 31.519,85.774 U6.32 ; Y1.2 30.775,76.859 31,76.634 v1(31,76.5) ; Y1.4 31.755,79.955 32.676,80.876 C1.1 32.708,82.104 33.718,82.104 v1(33.75,82.136) 33.75,82.002 34,81.752 C2.2 ; R15.1@34.802,72.11 v1(34.802,73.38) ; v1(37.401,77.31) 37.42,77.291 38.652,77.291 C9.1 38.721,77.272 39.319,76.675 D1.2 ; PS2.5 40.557,64.523 40.825,64.791 v1(40.906,64.791) 41.001,64.886 41.37,64.886 41.533,65.049 R13.1 ; U6.14 39.936,89.819 41.523,89.819 C5.1 41.579,89.814 41.852,89.54 C6.1@43.364,89.54 ; U6.16 40.085,91.425 40.259,91.598 C7.1 40.271,94.468 40.271,95.109 40.735,95.573 v1(40.735,97.122) ; C6.1 43.452,89.477 44.13,90.155 44.655,90.155 v1(44.75,90.25) ; v1(43.692,57.048) 43.696,57.052 43.696,58.099 D5.2 ; Q2.2 v1(49,54.7) 49.134,54.7 49.412,54.422 R22.2 ; C16.1 56.55,88.51 57.06,88 v1(58,88) 58.94,88 59.45,88.51 C15.1 ; C14.1@56.506,83.482 C14.1 56.55,83.488 57.038,83 v1(57.994,83) 58.94,83 59.45,83.51 C13.1 ; D3.1 57.467,77.292 57.467,76.033 v1(57.5,76) ; v1(57.5,61) D2.1 ; v1(57.5,69) D4.1 ; R24.2 57.972,100.05 v1(59.5,100.05) Q1.2 ; D13.1 58.027,57.205 58.027,58.52 v1(58.031,58.524) ; R43.2 v1(60.75,94.55) Q3.2 ; v1(59.433,82.231) 59.467,82.264 C13.1@59.467,83.477 ; C30.1 v1(61.333,52.809) ; v1(62.626,90.5) U3.2 ; U5.2 v1(67.937,52.682) ; v1(68.953,58.778) C29.1 70.579,57.533 J10.1@71.747,56.365 ; C10.1@70.466,66.544 C10.1 v1(72,66.5) ; C11.1 v1(70.5,82) ; C12.1@70.52,73.598 C12.1 70.422,73.55 72.748,75.876 72.748,76.248 J1.14 ; J1.14@73.372,76.5 J1.14@73.5,76.5
  Top Layer w0.305: v1(62.626,85.5) U2.2
  other v1: 36.707,59.461 19.215,59.714
GND2DSI: J1.8 Q3.3 | length 9.2
  Top Layer w0.254: J1.8@73.475,94.525 J1.8@73.5,94.5
  Top Layer w0.305: Q3.3 72,95.5 J1.8
GPIO_EXTI0: D4.2 R8.2 TP8.1 U6.12 | length 32.6
  Top Layer w0.254: U6.12 41.782,88.225 42.199,87.807 43.193,87.807 57.397,73.603 57.397,72.778 D4.2 ; D4.2@57.527,72.675 TP8.1 65.403,72.675 R8.2
GPIO_EXTI5: D13.2 R31.2 TP5.1 U6.10 | length 49.3
  Top Layer w0.254: U6.10 42.375,86.625 54,75 54,58.25 57.34,54.91 D13.2@58.044,54.91
  Top Layer w0.508: D13.2@58.044,54.91 60.766,54.91 TP5.1 61.968,56.111 R31.2
GPIO_EXTI6: D3.2 R6.2 TP55.1 U6.13 | length 29.5
  Top Layer w0.254: U6.13 41.7,89.025 42.41,88.315 46.86,88.315 55.5,79.675 D3.2 57.458,79.65 TP55.1 65.45,79.65 65.475,79.675 R6.2
GPIO_EXTI17: D2.2 R4.2 TP50.1 U6.11 | length 39
  Top Layer w0.254: U6.11 40.074,87.281 42.469,87.281 54.508,75.242 54.508,69.242 57.5,66.25 57.5,65.481 D2.2
  Top Layer w0.305: D2.2@57.623,65.481 TP50.1 62.529,65.49 65.49,65.49 R4.2
NetC1_2: C1.2 U6.2 Y1.1 | length 6.6
  Top Layer w0.254: Y1.1 30.775,80.509 31.686,81.42 C1.2 31.732,82.118 31.732,82.753 32.004,83.025 33.442,83.025 33.701,83.284 33.701,84.396 U6.2
NetC2_1: C2.1 U6.3 Y1.3 | length 7.7
  Top Layer w0.254: Y1.3 32.633,78.61 33.95,79.927 C2.1 34.05,79.927 34.376,80.253 34.425,80.253 34.681,80.509 34.681,81.606 34.55,81.737 U6.3
NetC10_2: C10.2 J1.7 R3.1 R4.1 | length 17.8
  Top Layer w0.254: R3.1 R4.1@66.922,65.55 ; R4.1@67.195,65.177 66.922,65.45 R4.1 R4.1@66.922,65.55 ; J1.7 76,73.55 69,66.55 C10.2 67.872,66.5 R4.1@66.922,65.55
NetC11_2: C11.2 J1.13 R5.1 R6.1 | length 8.7
  Top Layer w0.254: R5.1 R6.1 68.278,79.65 C11.2@69.078,80.45 ; C11.2 C11.2@69.078,80.45 ; J1.13 70.028,79.5 C11.2@69.078,80.45
NetC12_2: C12.2 J1.6 R7.1 R8.1 | length 14.8
  Top Layer w0.254: R8.1 R8.1@67,72.55 ; R7.1 R8.1@67,72.55 ; J1.6 74.614,79.5 73.243,78.129 72.129,78.129 71,77 71,75.55 69,73.55 C12.2 67.95,73.5 R8.1@67,72.55
NetC21_2: C21.2 PS2.3 R12.1 R13.2 | length 6.5
  Top Layer w0.203: PS2.3 40.728,63.523 40.98,63.775 41.922,63.775 42.134,63.563 R12.1 42.748,63.499 C21.2 44.2,64.122 44.081,64.241 43.488,64.241 R13.2@43.488,64.791
NetC26_2: C26.2 PS3.3 R17.1 R18.2 | length 6.1
  Top Layer w0.203: PS3.3 22.899,62.661 23.305,63.067 R17.1 24.244,62.991 C26.2@25.693,62.991 ; R18.2 24.835,64.591 25.033,64.393 25.033,64.318 25.184,64.167 25.184,63.55 25.544,63.189 25.544,63.139 C26.2@25.693,62.991 ; C26.2 C26.2@25.693,62.991
NetD5_1: D5.1 PS2.2 R28.1 | length 6.1
  Top Layer w0.203: PS2.2 39.824,63.004 40.911,63.004 41.414,62.501 R28.1 43.276,60.727 D5.1
NetD6_1: D6.1 R15.2 | length 2.2
  Top Layer w0.203: D6.1 R15.2
NetD7_1: D7.1 PS3.2 R16.1 | length 5.9
  Top Layer w0.203: PS3.2 23.042,62.161 23.406,61.797 23.406,60.037 ; R16.1@22.855,59.486 R16.1@22.93,59.486 ; R16.1@23.128,59.759 23.406,60.037 ; D7.1@25.184,59.341 24.488,60.037 23.406,60.037
NetD8_1: D8.1 R20.2 | length 2
  Top Layer w0.203: D8.1 R20.2
NetD9_2: D9.2 J2.1 Q2.3 | length 8.1
  Top Layer w0.635: J2.1 42.85,52.1 42.05,52.9 D9.2 42.05,53.367 42.433,53.75 Q2.3
NetJ1_12: J1.12 U2.1 | length 10
  Top Layer w0.254: U2.1 70.95,84.55 J1.12
NetPS2_1: PS2.1 R14.2 | length 9.2
  Top Layer w0.203: PS2.1 40.13,62.523 40.549,62.104 40.549,61.813 v1(40.644,61.718) ; v1(41.414,67.585) R14.2@42.43,67.585
  Bottom Layer w0.203: v1(40.644,61.718) 40.644,63.277 39.89,64.031 39.89,66.061 v1(41.414,67.585)
NetPS2_6: PS2.6 PS2.7 PS2.8 PS2.12 | length 2.6
  Top Layer w0.203: PS2.12 37.83,64.523 38.63,65.323 PS2.6
NetPS3_1: PS3.1 R19.2 | length 9.1
  Top Layer w0.203: PS3.1 21.882,61.638 21.882,61.042 22.136,60.788 v1(22.136,60.654) ; v1(22.39,67.385) R19.2
  Bottom Layer w0.203: v1(22.136,60.654) 22.136,63.706 21.882,63.96 21.882,66.877 v1(22.39,67.385)
NetPS3_6: PS3.6 PS3.7 PS3.8 PS3.12 | length 2.6
  Top Layer w0.203: PS3.12 20.252,63.661 20.258,63.667 20.386,63.667 21.18,64.461 PS3.6
NetQ1_1: Q1.1 R23.1 R24.1 | length 6.3
  Top Layer w0.254: R24.1 R23.1 Q1.1
NetQ2_1: Q2.1 R21.1 R22.1 | length 4.7
  Top Layer w0.254: Q2.1 50.05,52.8 R22.1 R21.1
NetQ3_1: Q3.1 R43.1 R44.1 | length 6.6
  Top Layer w0.305: R43.1 58,94.6 57.75,94.85 R44.1 61.575,96.75 61.875,96.45 Q3.1
NetR9_1: R9.1 U2.3 U2.4 | length 5.3
  Top Layer w0.254: R9.1 58.684,86.45 U2.4 U2.3
NetR10_1: R10.1 U3.3 U3.4 | length 4.8
  Top Layer w0.254: R10.1 59.174,91.45 U3.4 U3.3
NetR30_2: R30.2 U5.3 U5.4 | length 6.2
  Top Layer w0.254: U5.4 U5.3
  Top Layer w0.508: R30.2@63.523,49.276 65.12,49.276 65.651,48.745 66.957,48.745 U5.4
POT: J10.3 U5.1 | length 2.9
  Top Layer w0.508: U5.1 J10.3@71.747,51.285
RELAY: J1.9 Q1.3 | length 18.8
  Top Layer w0.254: Q1.3 70,101 74.5,96.5 74.5,93 J1.9
RLD: J1.10 U3.1 | length 9.6
  Top Layer w0.254: U3.1 71.95,89.55 J1.10
START: R44.2 U6.6 | length 27.2
  Top Layer w0.305: v1(36.95,83.025) U6.6 ; v1(51,96.5) 51.25,96.75 R44.2
  Bottom Layer w0.305: v1(36.95,83.025) 38.735,83.025 48.441,92.731 48.441,93.941 v1(51,96.5)
SYS_JTCK-SWCLK: J8.4 R1.1 U6.24 | length 11
  Top Layer w0.203: J8.4 R1.1@27.551,98.27 ; R1.1 27.578,98.247 32.41,93.415 32.777,93.415 32.95,93.241 U6.24
SYS_JTDO-SW0: J8.6 U6.26 | length 10.5
  Top Layer w0.203: J8.6 29,92.5 29,91.119 29.494,90.625 U6.26
SYS_JTMS-SWDIO: J8.2 R2.1 U6.23 | length 16.4
  Top Layer w0.203: J8.2 26.912,99.54 27.95,100.578 R2.1 30.344,100.578 31.781,99.14 33.407,99.14 33.75,98.797 U6.23
T_NRST: C9.2 D1.1 J8.10 U6.4 | length 26.4
  Top Layer w0.203: U6.4 v1(35.35,82.753) 35.35,81.584 38.473,78.461 38.473,78.411 38.621,78.262 38.721,78.262 39.334,78.875 D1.1
  Bottom Layer w0.203: J8.10 26.734,90.146 26.754,90.105 34.106,82.753 v1(35.35,82.753)
pads on no net: J1.2 J1.3 J1.4 J1.5 J1.11 J1.15 J1.16 J2.MH1 J2.MH2 J8.7 J8.8 J9.MH1 J9.MH2 J10.MH1 J10.MH2 PS2.4 PS2.13 PS3.4 PS3.13 U6.5 U6.19 U6.21 U6.22 U6.25 U6.31
copper on no net: | length 222
  Top Layer w0.254: 76.558,62.071 76.558,65.837 ; 76.558,62.071 76.558,65.837 ; 76.558,62.071 76.409,61.922 73.659,61.922 73.51,62.071 73.51,65.837 73.659,65.986 76.409,65.986 76.558,65.837 ; 76.558,62.071 76.707,61.922 79.457,61.922 79.606,62.071 ; 76.558,65.837 76.707,65.986 79.457,65.986 79.606,65.837 ; 79.606,62.071 79.606,65.837 ; 79.606,62.071 79.606,65.837 ; 79.606,62.071 79.755,61.922 82.505,61.922 82.654,62.071 ; 79.606,65.837 79.755,65.986 82.505,65.986 82.654,65.837 ; 82.654,62.071 82.654,65.837 ; 82.654,62.071 82.654,65.837 ; 82.654,62.071 82.803,61.922 85.553,61.922 85.702,62.071 85.702,65.837 85.553,65.986 82.803,65.986 82.654,65.837
  Layer 1 - GND w0.254: 76.558,62.071 76.558,65.837 ; 76.558,62.071 76.558,65.837 ; 76.558,62.071 76.409,61.922 73.659,61.922 73.51,62.071 73.51,65.837 73.659,65.986 76.409,65.986 76.558,65.837 ; 76.558,62.071 76.707,61.922 79.457,61.922 79.606,62.071 ; 76.558,65.837 76.707,65.986 79.457,65.986 79.606,65.837 ; 79.606,62.071 79.606,65.837 ; 79.606,62.071 79.606,65.837 ; 79.606,62.071 79.755,61.922 82.505,61.922 82.654,62.071 ; 79.606,65.837 79.755,65.986 82.505,65.986 82.654,65.837 ; 82.654,62.071 82.654,65.837 ; 82.654,62.071 82.654,65.837 ; 82.654,62.071 82.803,61.922 85.553,61.922 85.702,62.071 85.702,65.837 85.553,65.986 82.803,65.986 82.654,65.837
  Layer 2 - POWER w0.254: 76.558,62.071 76.558,65.837 ; 76.558,62.071 76.558,65.837 ; 76.558,62.071 76.409,61.922 73.659,61.922 73.51,62.071 73.51,65.837 73.659,65.986 76.409,65.986 76.558,65.837 ; 76.558,62.071 76.707,61.922 79.457,61.922 79.606,62.071 ; 76.558,65.837 76.707,65.986 79.457,65.986 79.606,65.837 ; 79.606,62.071 79.606,65.837 ; 79.606,62.071 79.606,65.837 ; 79.606,62.071 79.755,61.922 82.505,61.922 82.654,62.071 ; 79.606,65.837 79.755,65.986 82.505,65.986 82.654,65.837 ; 82.654,62.071 82.654,65.837 ; 82.654,62.071 82.803,61.922 85.553,61.922 85.702,62.071 85.702,65.837 85.553,65.986 82.803,65.986 82.654,65.837 ; 82.654,62.071 82.654,65.837
  Bottom Layer w0.254: 76.558,62.071 76.558,65.837 ; 76.558,62.071 76.558,65.837 ; 76.558,62.071 76.707,61.922 79.457,61.922 79.606,62.071 ; 76.558,62.071 76.409,61.922 73.659,61.922 73.51,62.071 73.51,65.837 73.659,65.986 76.409,65.986 76.558,65.837 ; 76.558,65.837 76.707,65.986 79.457,65.986 79.606,65.837 ; 79.606,62.071 79.606,65.837 ; 79.606,62.071 79.606,65.837 ; 79.606,62.071 79.755,61.922 82.505,61.922 82.654,62.071 ; 79.606,65.837 79.755,65.986 82.505,65.986 82.654,65.837 ; 82.654,62.071 82.803,61.922 85.553,61.922 85.702,62.071 85.702,65.837 85.553,65.986 82.803,65.986 82.654,65.837 ; 82.654,62.071 82.654,65.837 ; 82.654,62.071 82.654,65.837

## Polygon pours and split planes (outlines as drawn)
GND on Layer 1 - GND "GND_L02_P014" (solid, pour order 14): 10,107.442 10,38.5 86.614,38.5 86.614,107.442
GND on Layer 1 - GND "GND_L02_P007" (solid, pour order 7): 27.146,64.135 29.21,64.135 29.21,62.547 27.146,62.547
GND on Top Layer "GND_L01_P009" (solid, pour order 9): 36.334,64.283 36.334,63.521 36.842,63.521 37.096,63.267 37.096,60.731 38.62,60.731 38.62,56.286 35.826,56.286 35.826,64.283
GND on Top Layer "GND_L01_P011" (solid, pour order 11): 18.834,62.559 19.088,62.305 19.088,60.527 20.104,60.527 20.104,54.812 16.929,54.812 16.929,62.559
28VDC on Top Layer "28VDC_L01_P012" (solid, pour order 12): 20.358,61.289 21.12,61.289 21.12,60.044 22.136,60.044 22.136,54.812 20.358,54.812
3.3V on Top Layer "3.3V_L01_P013" (solid, pour order 13): 19.088,66.369 19.088,64.083 16.548,64.083 16.548,55.193 15.278,55.193 15.278,65.099 16.548,66.369
28VDC on Top Layer "28VDC_L01_P008" (solid, pour order 8): 40.603,60.858 39.12,60.858 39.12,56.286 42.422,56.286 42.422,59.965 40.603,59.965
+12 on Top Layer "+12_L01_P010" (solid, pour order 10): 37.096,67.331 37.096,65.045 35.183,65.045 35.183,56.155 33.794,56.155 33.794,66.835 34.29,67.331
3.3V on Layer 2 - POWER "3.3V_L03_P016" (solid, pour order 16): 10,107.442 10,38.5 86.614,38.5 86.614,107.442

## Other copper
Top Layer:
  text "1" at 74.78,63.192 h1.52
Layer 1 - GND:
  text "2" at 77.574,63.192 h1.52
Layer 2 - POWER:
  text "3" at 80.622,63.192 h1.52
Bottom Layer:
  text "4" at 84.686,63.192 h1.52
Multi-Layer:
  pour cut-out: 73.51,65.986 73.51,61.922 85.628,61.922 85.628,65.986

## Silkscreen, mask and mechanical layers (free items; w line width, h text height)
Board:
  lines w0.254: 86.614,107.442 86.614,38.5 10,38.5 10,107.442 86.614,107.442 ; 86.614,107.442 86.614,107.442

## Text inside footprints (layer, text, board x,y; h text height)
Q1: Top Overlay "D" at 63.905,100.568 h0.8; Top Overlay "S" at 60.527,98.485 h0.8; Top Overlay "G" at 61.568,100.594 h0.8
Q2: Top Overlay "D" at 44.82,54.148 h0.8 r180; Top Overlay "S" at 48.25,55.55 h0.8 r90; Top Overlay "G" at 48.35,51.35 h0.8 r90
Q3: Top Overlay "G" at 61.575,97.5 h0.8; Top Overlay "S" at 61.575,92.75 h0.8; Top Overlay "D" at 65.25,95 h0.8